# Altium PCB LM2596_DC_TO_DC_PCB1.PcbDoc
Units mm, origin at the board's own origin, x right, y up, seen from the top; angles counter-clockwise.
Board outline 55.88 x 27.18 mm, 2 copper layers (Top Layer, Bottom Layer); 9 components, 5 nets, 22 pads, 4 vias.
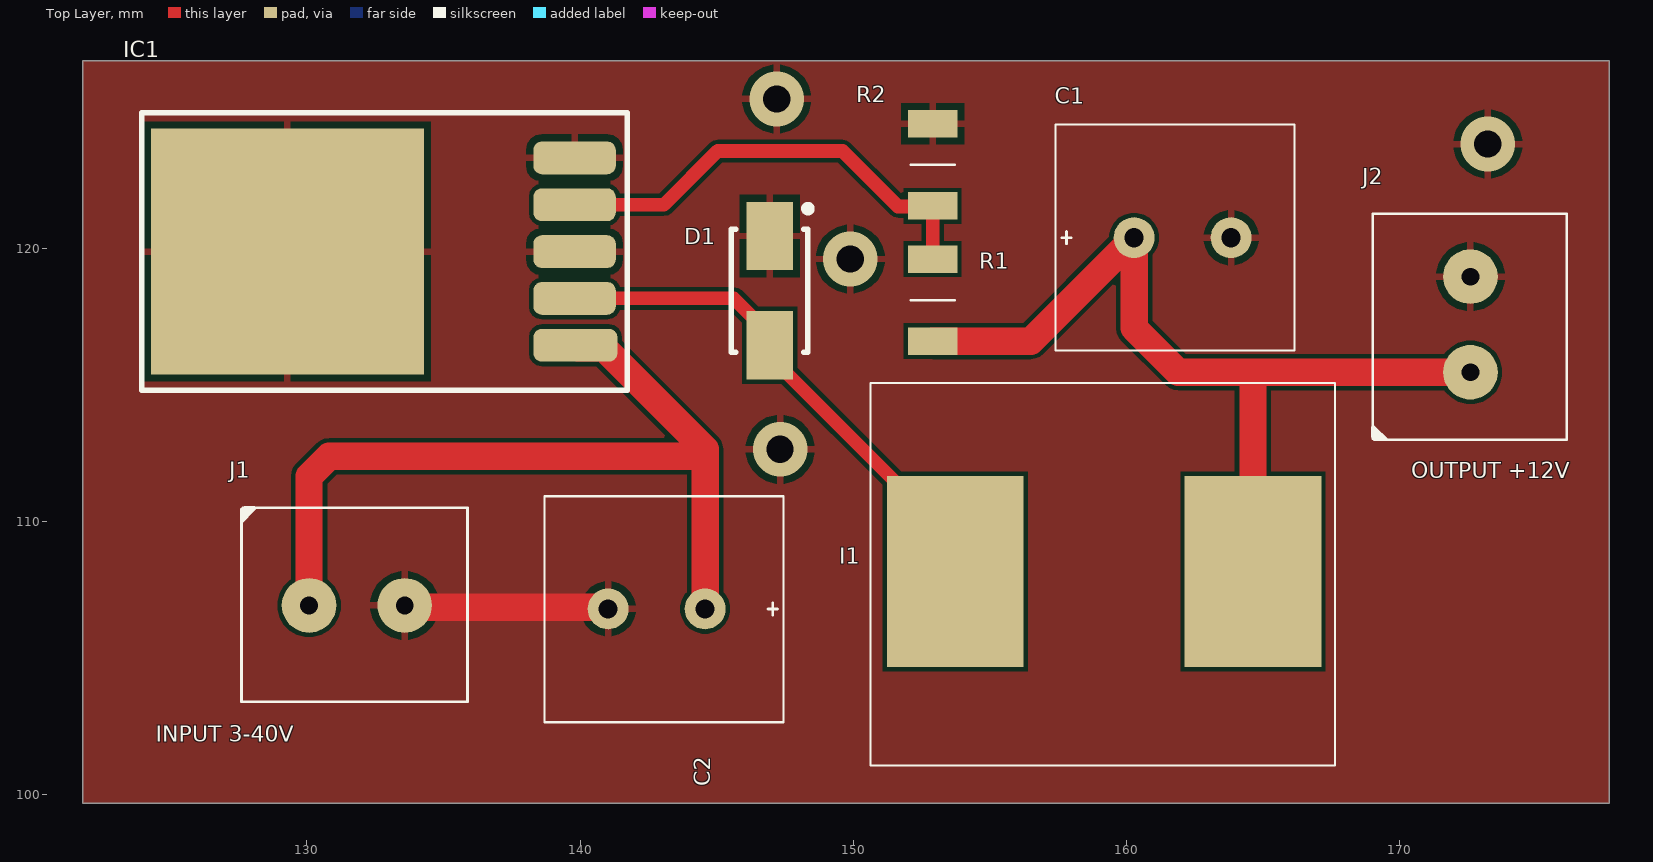
[diagram p0: Top Layer view]
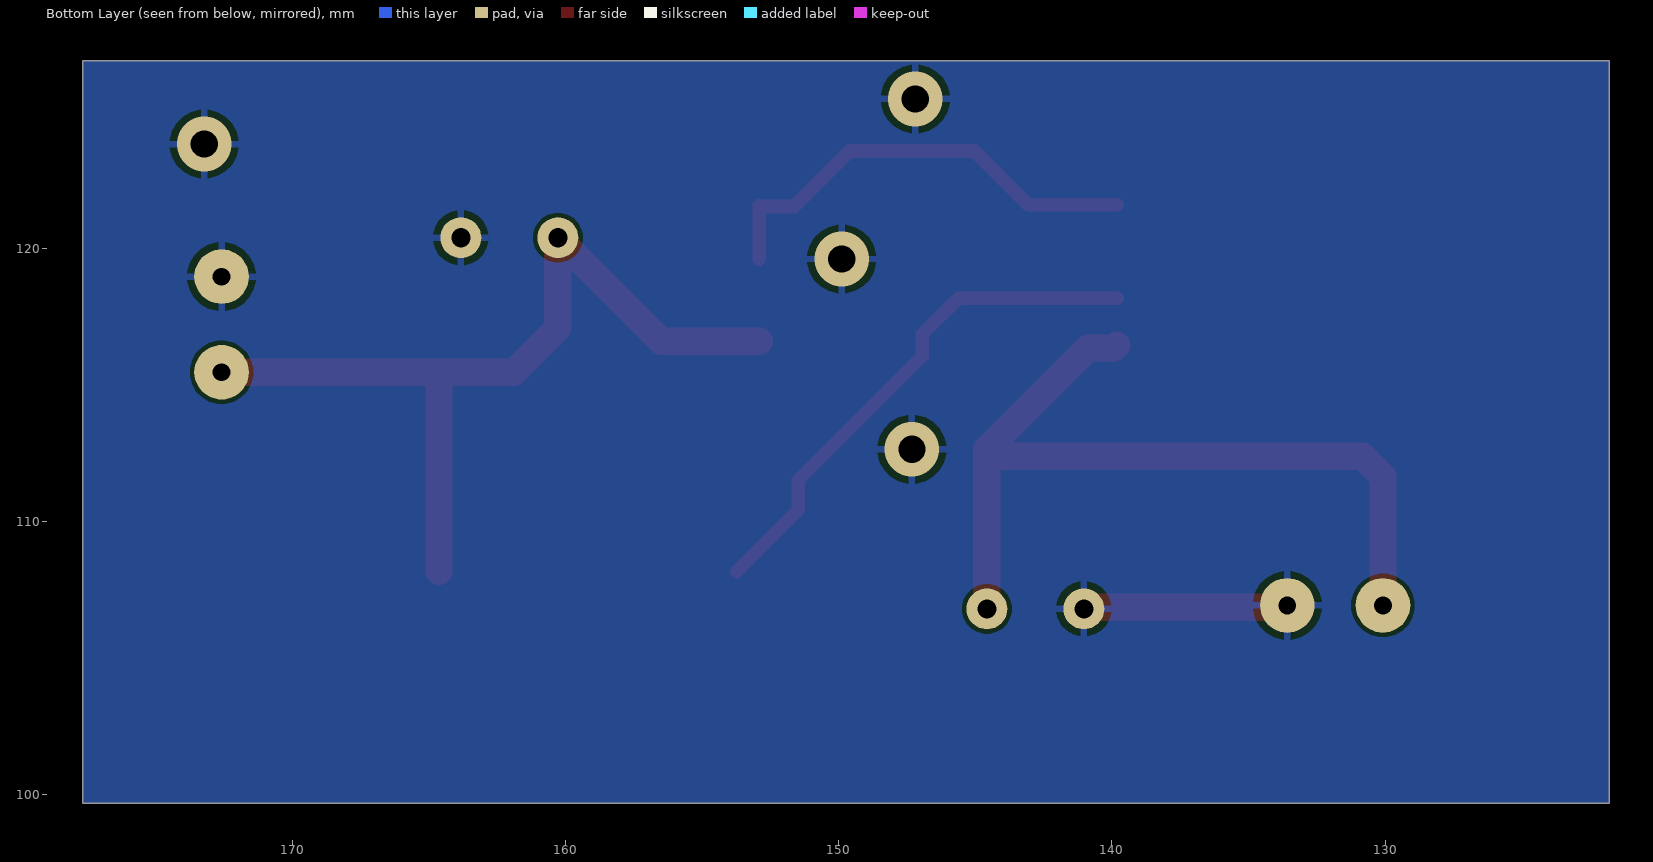
[diagram p1: Bottom Layer view, seen from below]
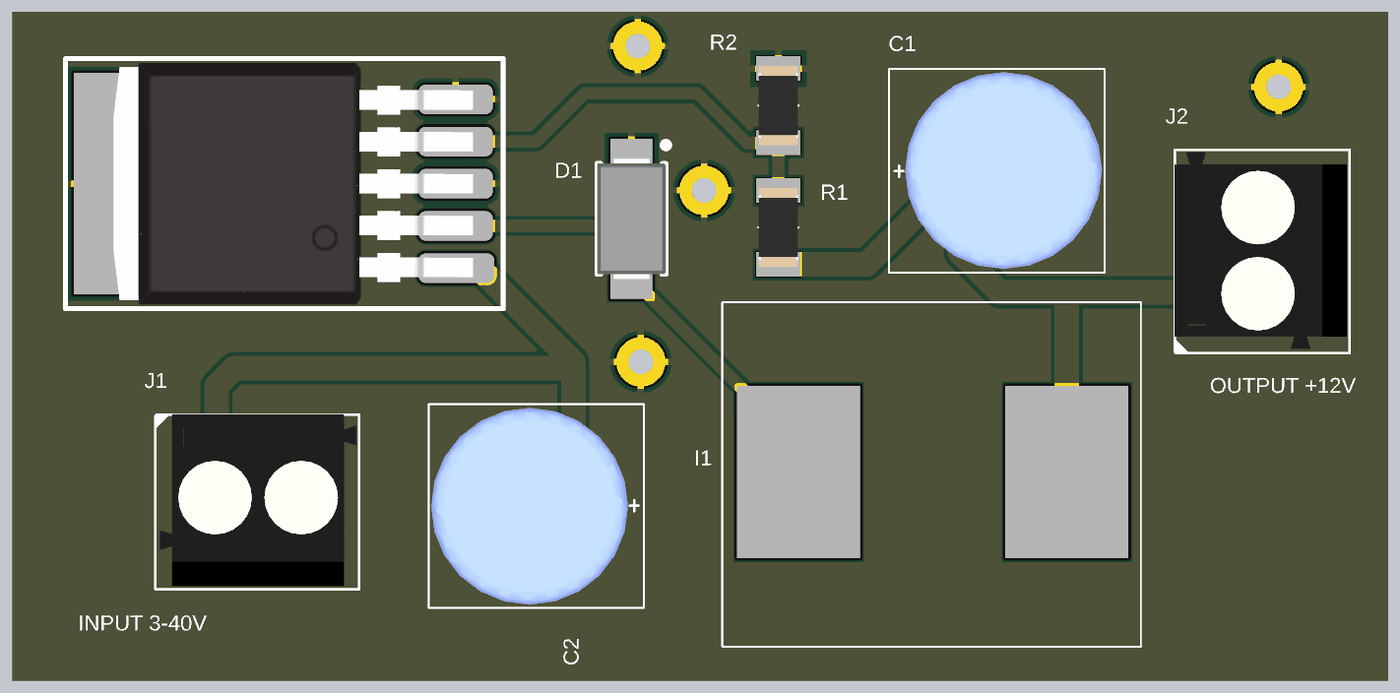
[diagram p2: 3D render of the assembled board from above, using the file's embedded part models]

## Layer stack, top to bottom
Top Solder: solder mask 0.0102, Solder Resist, Dk 3.5
Top Layer: signal copper 0.0356
Dielectric 1: dielectric 0.32, FR-4, Dk 4.8
Bottom Layer: signal copper 0.0356
Bottom Solder: solder mask 0.0102, Solder Resist, Dk 3.5

## Board outline
121.793,99.695 121.793,126.873 177.673,126.873 177.673,99.695

## Design rules (kind name [scope] priority, off if disabled: settings)
Clearance [All] p1: gap=0.152 ignorepadtopadclearanceinfootprint=FALSE
HoleSize [All] p1: absolutevalues=TRUE maxlimit=3 minlimit=0.025 maxpercent=80.000 minpercent=20.000
PolygonConnect [All] p1: connectstyle=Relief reliefconductorwidth=0.254 reliefentries=4 polygonreliefangle="90 Angle" airgapwidth=0.254
RoutingVias [All] p1: holewidth=0.711 width=1.27 viastyle="Through Hole" minholewidth=0.711 minwidth=1.27 maxholewidth=0.711 maxwidth=1.27
SolderMaskExpansion [All] p1: expansion=0.102 istentingtop=FALSE
Width [All] p1: maxlimit=3 minlimit=0.152 preferedwidth=0.5
29 further rules are at their usual default settings.

## Components (designator, comment, footprint, x,y, rotation, side; value= is the part's Value field where it differs from the comment)
C1 "CAP 220uF 35V" CAPACITOR 161.98,120.396 r90 top
C2 "CAP 100uF 63V" CAPACITOR 142.875,106.807 r270 top
D1 "DIODE_deneme" DIODE_deneme 146.939,118.459 r270 top
I1 "INDUCTOR_33uH" SRR1280_Inductor 159.131,108.077 r90 top
IC1 "LM2596" D2PAK 130.937,119.888 r90 top
J1 "klemens 1x2 3.5mm" "klemens 1x2 3.5mm" 131.826,106.934 r0 top
J2 "klemens 1x2 3.5mm" "klemens 1x2 3.5mm" 172.593,117.221 r90 top
R1 "RESISTOR 10K R1206" "R1206 RESISTER" 152.908,118.11 r270 top
R2 "RESISTOR 4.7K R1206" "R1206 RESISTER" 152.908,123.063 r270 top

## Footprints (in the part's own frame and the unit in brackets; to place one, negate y for a bottom-side part, rotate by r counter-clockwise, add the part's x,y. Pads: shape width x height; smd on the part's side, far side on the other; paste and mask are expansions set on the pad)
CAPACITOR [mm]
  round 1.5 hole 0.7: 1(0,1.7) 2(0,-1.85)
  silkscreen extent -4.13,-4.18 4.15,4.57, body extent -3.97,-4.08 4.03,3.93, height 11.88
D2PAK [mm]
  rrect50% 1.2x3.075 smd: 1(-3.429,-8.89)
  rrect50% 1.2x3.015 smd: 2(-1.714,-8.86) 3(0,-8.86) 4(1.715,-8.86) 5(3.429,-8.86)
  rect 9x10 smd: 3(0,1.651)
  silkscreen extent -5.08,-10.79 5.08,6.98, body extent -4.91,-9.56 4.91,5.04, height 4.22
DIODE_deneme [mm] "Molded Diode, 2-Leads, Body 4.25x2.67mm, IPC Medium Density"
  rect 2.5x1.7 smd: 1(-2,0) 2(2,0)
  silkscreen extent -3.12,-1.4 2.25,1.53, body extent -2.47,-1.4 2.47,1.4, height 2.99
"klemens 1x2 3.5mm" [mm]
  round 2 hole 0.65: 1(-1.75,0) 2(1.75,0)
  silkscreen extent -4.26,-3.52 4.05,3.63, body extent -4.05,-3.4 3.94,3.6, height 8.9
"R1206 RESISTER" [mm]
  rect 1x1.8 smd mask+0.05: 1(-1.5,0) 2(1.5,0)
  silkscreen extent 0,-0.8 0,0.81, body extent -1.6,-0.8 1.6,0.81, height 0.55
SRR1280_Inductor [mm]
  rect 7x5 smd: 1(0.1,5.4) 2(0.1,-5.5)
  silkscreen extent -7,-8.5 7,8.5, body extent -6.25,-6.25 6.25,6.25, height 8.5

## Part data
C2: "CAPACITOR"
D1: "diode deneme yaptık kafamıza göre"
I1: "INDUCTOR_33uH_SRR1280"
IC1: "REGULATOR  DC TO DC ,DUCK CONVERTER"
J1 J2: "Klemens 1x2 3.5mm"
R1 R2: "R1206 RESISTER"

## Via types
v1: diameter 2, hole 1, Top Layer to Bottom Layer, 4 vias

## Nets (pads, with @x,y where several pads share a name; then routed paths per layer and width w, separated by ;. In a path a pad name is that pad's centre, name@x,y a point inside that pad or via, vN(x,y) a via of type N, cw(c..) or ccw(c..) an arc to the next point about the centre after c; other vN are vias at no path point)
+12V: C1.1 I1.2 J2.1 R1.2 | length 32.5
  Top Layer w1: R1.2 156.494,116.61 C1.1 160.28,117.088 161.897,115.471 164.592,115.471 ; I1.2 164.631,115.432 164.592,115.471 ; J2.1 164.592,115.471
GND: C1.2 C2.2 D1.1 IC1.3 IC1.5 J1.2 J2.2 R2.1 | length 7.5
  Top Layer w1: J1.2 133.64,106.87 140.962,106.87 C2.2
  other v1: 147.32,112.649 149.889,119.617 173.228,123.825 147.193,125.476
NetD1_2: D1.2 I1.1 IC1.2 | length 19.2
  Top Layer w0.5: IC1.2 145.624,118.173 146.939,116.859 D1.2 146.939,116.059 151.481,111.517 151.481,110.427 I1.1
NetIC1_4: IC1.4 R1.1 R2.2 | length 16.7
  Top Layer w0.5: IC1.4 143.065,121.602 145.034,123.571 149.606,123.571 151.638,121.539 152.884,121.539 R2.2 R1.1
VCC: C2.1 IC1.1 J1.1 | length 31.8
  Top Layer w1: J1.1 130.076,111.661 130.81,112.395 144.321,112.395 144.575,112.648 ; IC1.1 139.927,116.359 140.864,116.359 144.575,112.648 ; C2.1 144.575,112.648

## Polygon pours and split planes (outlines as drawn)
GND on Bottom Layer "GND_L02_P000" (solid, pour order 0): 121.816,126.875 121.793,126.852 121.793,99.695 177.673,99.695 177.67,99.698 177.67,126.873 121.793,126.873
GND on Top Layer "GND_L01_P001" (solid, pour order 1): 121.816,126.875 121.793,126.852 121.793,99.695 177.673,99.695 177.67,99.698 177.67,126.873 121.793,126.873

## Silkscreen, mask and mechanical layers (free items; w line width, h text height)
Top Overlay:
  text "OUTPUT +12V" at 170.434,111.39 h1
  text "INPUT 3-40V" at 124.46,101.738 h1
Mechanical 1:
  the board outline again, w0.076